# Altium PCB viper_eagle_rep.PcbDoc (part 2 of 4)
Units mm, origin at the board's own origin, x right, y up, seen from the top; angles counter-clockwise.
Board outline 285.4 x 100.18 mm, 2 copper layers (Component Side, Bottom Layer), stack 1.571 mm thick; 351 components, 206 nets, 1213 pads, 248 vias.
Unrouted connection lines stored in the file: 357.
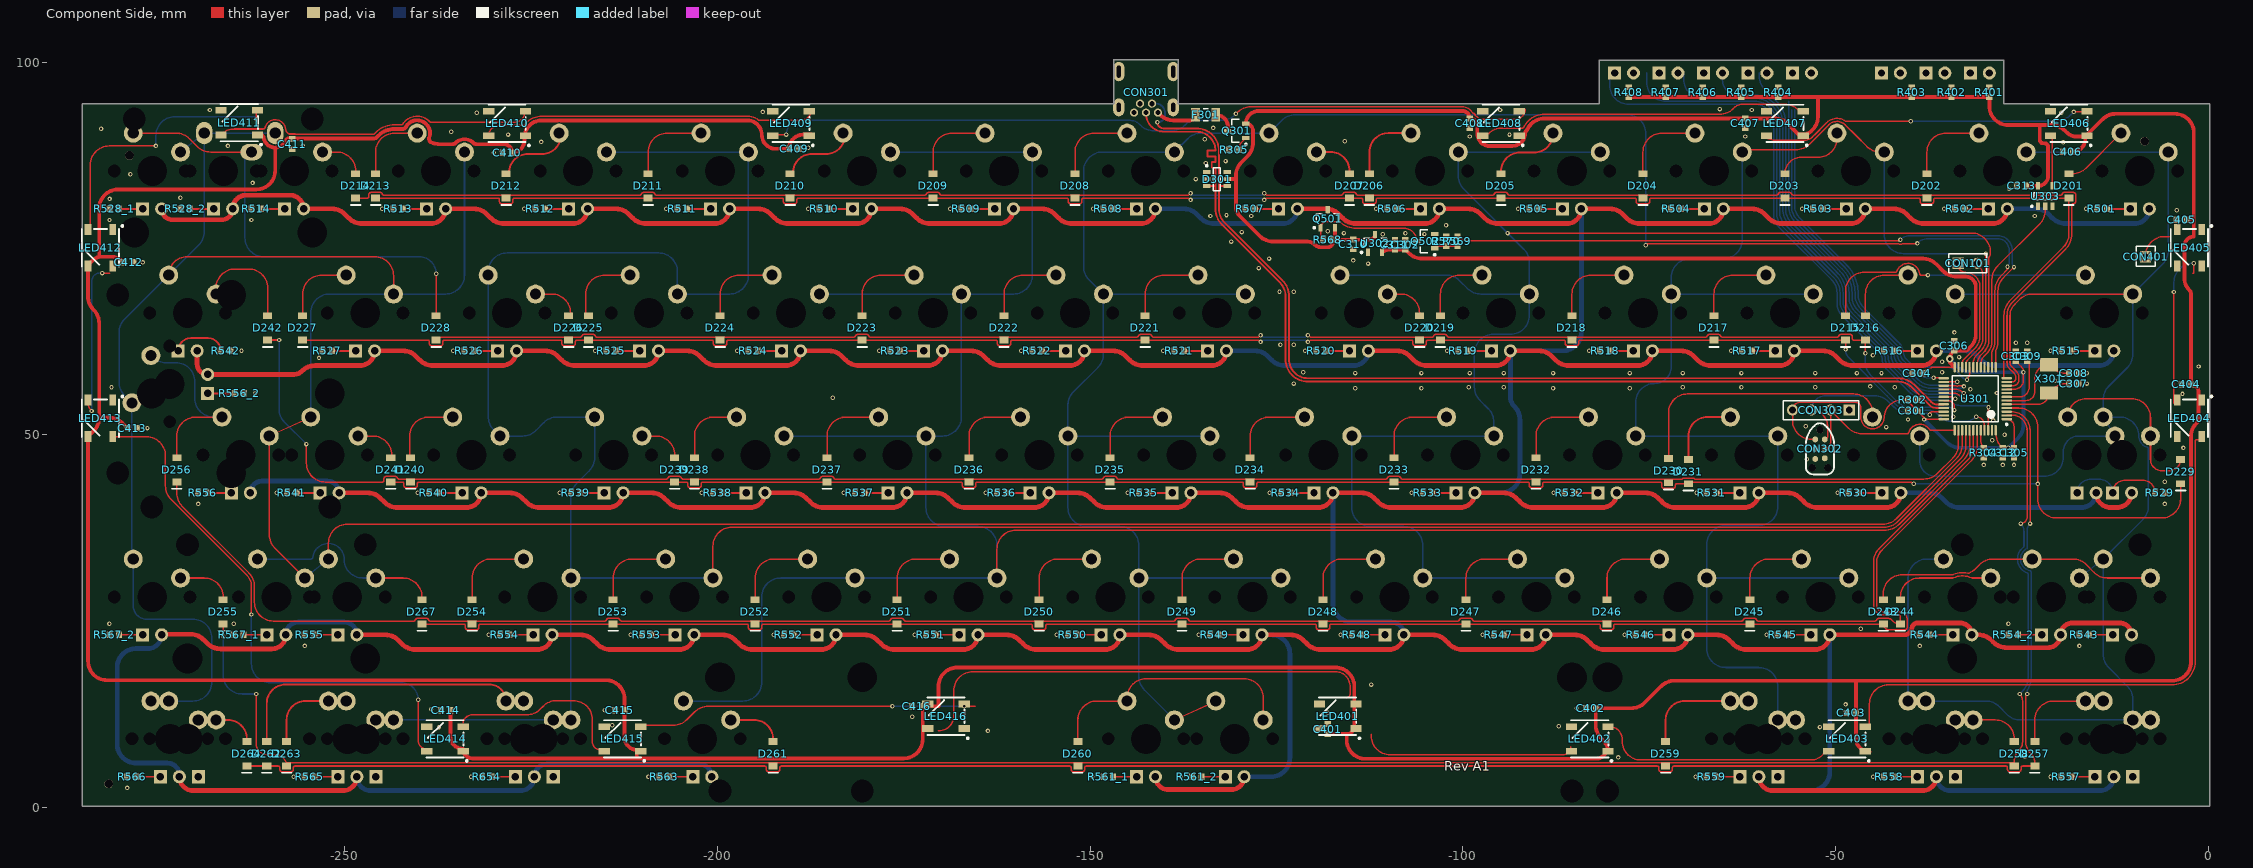
[diagram p0: Component Side view]

## Via types
v1: diameter 0.6, hole 0.3, Component Side to Bottom Layer, tented both sides, 247 vias
v2: diameter 1, hole 0.5, Component Side to Bottom Layer, tented both sides, 1 vias

## Nets (pads, with @x,y where several pads share a name; then routed paths per layer and width w, separated by ;. In a path a pad name is that pad's centre, name@x,y a point inside that pad or via, vN(x,y) a via of type N, cw(c..) or ccw(c..) an arc to the next point about the centre after c; other vN are vias at no path point) (continued)
col7: (continued)
  Bottom Layer w0.203: S264.2@-273.627,14.295 -270.383,14.295 ccw(c-270.383,16.835) -267.843,16.835 -267.843,22.733 ccw(c-270.383,22.733) -270.383,25.273 -276.606,25.273 cw(c-276.606,27.057) -278.39,27.057 S255.2@-278.39,33.345 cw(c-277.98,33.755) -278.56,33.755 S256.2@-278.56,54.305 -279.545,55.29 cw(c-277.749,57.086) -280.289,57.086 -280.289,63.731 cw(c-277.749,63.731) -279.545,65.527 S242.2@-273.627,71.445 -269.603,75.47 ccw(c-271.399,77.266) -268.859,77.266 S228.1@-268.859,90.495 ; S228.1@-272.034,87.955 S228.1@-268.859,90.495 ; S214.2@-259.34,90.495 S228.1@-268.859,90.495 ; S267.2@-255.37,30.805 S267.2@-252.195,33.345 ; S241.2@-254.571,52.395 -254.571,66.365 cw(c-252.031,66.365) -252.031,68.905 S227.2@-243.465,68.905 -236.48,68.905 ccw(c-236.48,71.445) -233.94,71.445 S213.2@-233.94,87.955
D_N: CON301.2 D301.4 U301.32 | length 138.1
  Component Side w0.254: v1(-140.97,91.948) ccw(c-140.157,91.948) -140.294,91.147 ccw(c-140.081,93.097) -140.081,91.135 -135.712,91.135 cw(c-135.712,88.138) -132.715,88.138 -132.715,83.312 ; D301.4@-131.594,83.378 -132.649,83.378 -132.715,83.312 ; U301.32@-35.467,54.114 -35.476,54.105 -36.083,54.105 cw(c-36.114,54.136) -36.114,54.093 -36.322,54.093 cw(c-36.322,55.268) -36.324,54.093 cw(c-36.322,55.268) -37.153,54.437 -39.446,56.73 ccw(c-41.564,54.612) -41.564,57.607 -120.777,57.607 cw(c-120.777,60.147) -123.317,60.147 -123.317,68.622 ccw(c-126.311,68.622) -124.194,70.738 -131.971,78.516 cw(c-130.175,80.312) -132.715,80.312 -132.715,83.312
  Bottom Layer w0.254: CON301.2@-141.7,94.45 -141.163,94.45 cw(c-141.163,93.279) -140.335,94.107 cw(c-141.255,93.187) -139.954,93.187 -139.954,92.964 cw(c-140.97,92.964) v1(-140.97,91.948)